# Altium PCB USB2JTAG.PcbDoc (part 2 of 2)
Units mm, origin at the board's own origin, x right, y up, seen from the top; angles counter-clockwise.
Board outline 52 x 33 mm, 2 copper layers (Top Layer, Bottom Layer), stack 1.535 mm thick; 102 components, 81 nets, 369 pads, 123 vias.
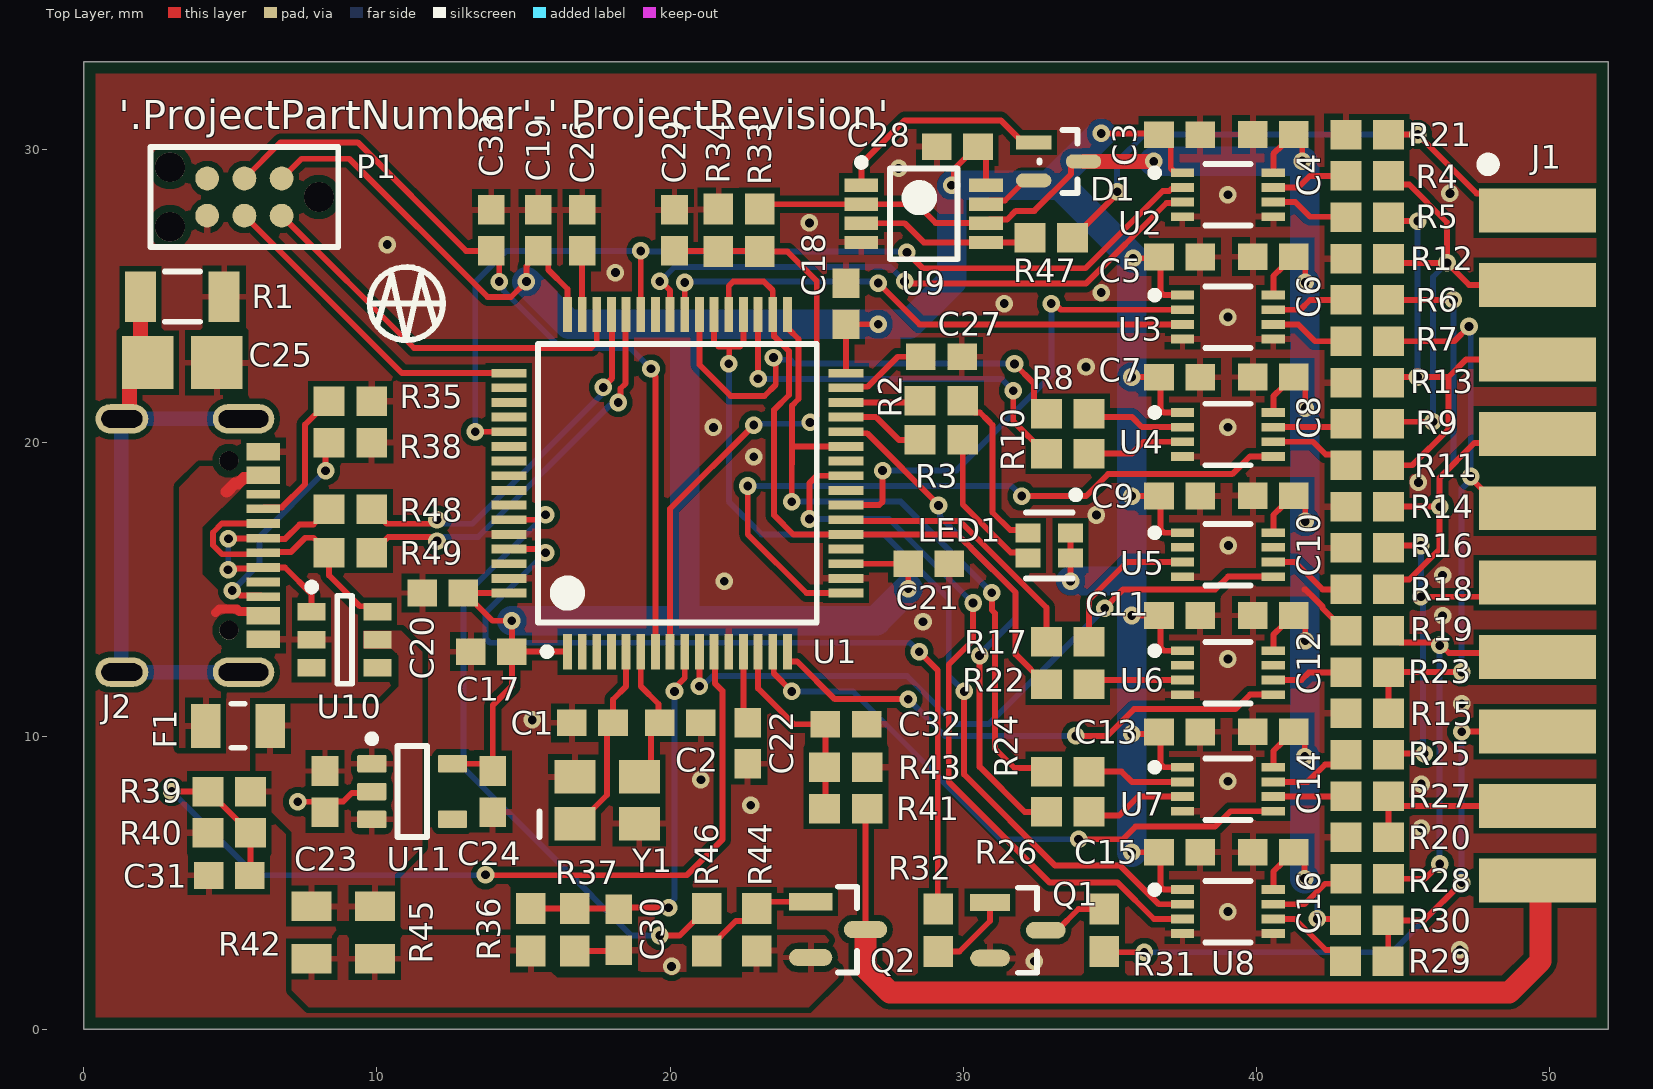
[diagram p0: Top Layer view]

## Via types
v1: diameter 0.6, hole 0.3, Top Layer to Bottom Layer, tented both sides, 123 vias

## Nets (pads, with @x,y where several pads share a name; then routed paths per layer and width w, separated by ;. In a path a pad name is that pad's centre, name@x,y a point inside that pad or via, vN(x,y) a via of type N, cw(c..) or ccw(c..) an arc to the next point about the centre after c; other vN are vias at no path point) (continued)
STM-RESETn: C33.1 P1.3 U1.7 | length 27.8
  Top Layer w0.2: P1.3 6.71,30.25 9.342,30.25 13.044,26.548 C33.1 14.173,26.275 v1(14.173,25.501) ; v1(19.35,22.528) 19.35,22.42 19.5,22.27 U1.7
  Bottom Layer w0.2: v1(14.173,25.501) 14.173,25.392 14.318,25.247 14.318,25.197 16.277,23.239 18.639,23.239 v1(19.35,22.528)
STM-SWCLK: P1.4 U1.49 | length 11.2
  Top Layer w0.2: P1.4 10.852,22.378 U1.49
STM-SWDIO: P1.2 U1.46 | length 13.6
  Top Layer w0.2: P1.2 11.261,23.239 17.296,23.239 17.5,23.443 U1.46
TCK_SWCLK: J1.9 R7.2 R15.1 R23.2 | length 21.7
  Top Layer w0.2: R15.1 R23.2 v1(47,12.184) ; R7.2 46.747,23.466 v1(47.25,23.969) ; v1(47.308,18.854) 47.308,18.802 48.34,17.77 J1.9@49.69,17.77
  Bottom Layer w0.2: v1(47,12.184) 47,18.437 47.308,18.746 47.308,23.911 v1(47.25,23.969)
TDI_TX: J1.5 R5.2 R11.2 R13.1 | length 16.2
  Top Layer w0.2: R11.2 45.316,19.235 46.55,20.469 46.55,22.248 ; R13.1 44.692,22.248 45.5,22.248 46.55,22.248 ; R5.2 44.632,27.565 v1(45.5,27.565) ; J1.5@49.69,22.85 47.152,22.85 46.55,22.248
  Bottom Layer w0.2: v1(45.494,22.248) 45.497,22.251 45.497,27.562 v1(45.5,27.565)
TDO_SWO: J1.13 R19.1 R28.2 | length 15
  Top Layer w0.2: R28.2 45.747,5.132 v1(46.25,5.635) ; R19.1 44.903,13.191 46.042,13.191 46.142,13.091 46.31,13.091 46.567,12.834 49.546,12.834 J1.13@49.69,12.69
  Bottom Layer w0.2: v1(46.25,5.635) v1(46.25,13.091)
TMS_SWDIO: J1.7 R6.2 R14.1 R18.2 | length 20
  Top Layer w0.2: R18.2 44.838,15.343 45.21,15.343 46.25,16.382 v1(46.25,17.825) ; R14.1 v1(46.25,17.825) ; R6.2 v1(46.72,24.876) ; J1.7@49.69,20.31 49.382,20.002 47.442,20.002 46.25,18.81 v1(46.25,17.825)
  Bottom Layer w0.2: v1(46.25,17.825) 46.25,18.81 46.72,19.28 v1(46.72,24.876)
USB_D_N: R49.1 U1.44 | length 13.8
  Top Layer w0.2: R49.1 9.847,16.25 10.384,16.787 11.804,16.787 11.941,16.651 v1(12.049,16.651) ; v1(18.233,21.378) 18.309,21.454 18.309,21.854 18.477,22.021 18.477,24.355 U1.44
  Bottom Layer w0.2: v1(12.049,16.651) 12.157,16.651 12.294,16.787 13.449,16.787 17.963,21.301 18.156,21.301 v1(18.233,21.378)
USB_D_P: R48.1 U1.45 | length 12.9
  Top Layer w0.2: R48.1 9.847,17.728 10.333,17.241 11.804,17.241 11.941,17.378 v1(12.049,17.378) ; v1(17.719,21.892) 17.719,21.905 18.023,22.209 18.023,24.355 U1.45
  Bottom Layer w0.2: v1(12.049,17.378) 12.157,17.378 12.294,17.241 13.261,17.241 17.642,21.622 17.642,21.815 v1(17.719,21.892)
VCCB: C4.2 C6.2 C8.2 C10.2 C12.2 C14.2 C16.2 D1.3 R30.1 R33.2 U2.8 U3.8 U4.8 U5.8 U6.8 U7.8 U8.8 U9.2 U9.6 | length 65.4
  Top Layer w0.2: R33.2 23.214,28.14 U9.2 28.421,28.14 29.058,27.503 30.762,27.503 U9.6 30.9,27.615 31.494,27.615 31.794,27.915 32.425,27.915 33.681,29.171 33.681,29.473 33.808,29.6 D1.3 ; U8.8 40.578,5.38 40.876,5.678 40.876,5.68 41.232,6.037 41.288,6.037 41.644,5.68 v1(41.644,5.136) ; U7.8 40.578,9.492 40.876,9.789 40.876,9.792 41.232,10.148 41.291,10.148 41.648,9.792 v1(41.648,9.298) ; U6.8 40.578,13.455 40.876,13.753 40.876,13.755 41.232,14.112 41.308,14.112 41.664,13.755 v1(41.664,13.25) ; U5.8 40.578,17.539 40.876,17.837 40.876,17.839 41.232,18.195 41.308,18.195 41.664,17.839 v1(41.664,17.322) ; U4.8 40.578,21.592 40.876,21.889 40.876,21.892 41.232,22.248 41.308,22.248 41.664,21.892 v1(41.664,21.187) ; U3.8 40.578,25.695 40.876,25.993 40.876,25.995 41.232,26.351 41.308,26.351 41.664,25.995 v1(41.664,25.473) ; U2.8 40.578,29.859 40.876,30.157 40.876,30.161 41.232,30.517 C4.2 41.565,30.232 v1(41.565,29.61) ; v1(42.079,3.762) 42.99,3.762 R30.1
  Top Layer w0.5: D1.3 v1(36.5,29.6)
  Bottom Layer w0.2: v1(41.644,5.136) 42.079,4.701 v1(42.079,3.762)
  Bottom Layer w1: v1(36.5,29.6) 36.51,29.61 v1(41.565,29.61) 41.644,29.531 v1(41.644,5.136)
VTref: J1.1 R21.1 R47.2 | length 20.1
  Top Layer w0.2: R47.2 33.75,27 35.25,28.5 v1(35.25,28.565) ; R21.1 v1(45.5,30.517) 47.507,28.51 49.11,28.51 J1.1@49.69,27.93
  Bottom Layer w0.2: v1(35.25,28.565) 35.25,29.587 36.181,30.517 v1(45.5,30.517)
pads on no net: J1.2 J2.A8 J2.B8 J2.H P1.5 P1.M1 P1.M2 P1.M3 U1.2 U1.3 U1.4 U1.20 U1.24 U1.26 U1.42 U1.50 U1.51 U1.52 U1.54 U1.55 U1.56 U1.57 U1.58 U1.62 U5.2 U5.7 U6.2 U6.7 U10.3 U10.4 U11.4

## Polygon pours and split planes (outlines as drawn)
GND on Top Layer "GND_L01_P003" (solid, remove dead copper, pour order 3): 0,33 0,0 52,0 52,33
NetF1_1 on Top Layer "NETF1_1_L01_P002" (solid, pour order 2): 3.961,19.2 3.25,18.489 3.25,9.6 4.666,9.6 4.666,12.941 5.525,13.8 6.675,13.8 6.675,14.4 5.166,14.4 4.048,15.517 4.048,17.123 5.525,18.6 6.675,18.6 6.675,19.2
NetQ2_2 on Top Layer "NETQ2_2_L01_P001" (solid, pour order 1): 7.09,3.198 7.09,1.331 7.671,0.75 24.73,0.75 25.73,1.75 25.73,2.743 25.273,3.2 22.453,3.2 22.453,1.75 16.146,1.75 15.753,2.143 15.753,3.198 14.747,3.198
+5V on Top Layer "+5V_L01_P000" (solid, pour order 0): 5.866,11.1 10.152,11.1 10.75,11.698 10.75,12.734 10.499,12.985 9.549,12.985 9.549,13.585 10.838,13.585 11.545,12.878 11.545,6.202 10.609,5.265 10.609,3.696 7.09,3.696 7.09,6.727 5.866,7.951 5.866,9.6
GND on Bottom Layer "GND_L02_P004" (solid, remove dead copper, pour order 4): 0,33 0,0 52,0 52,33

## Silkscreen, mask and mechanical layers (free items; w line width, h text height)
Top Overlay:
  circle w0.2: c11,24.75 r1.25
  lines w0.2: 9.75,24.75 12.25,24.75 ; 10,24 10.5,25.75 11,23.5 11.5,25.75 12,24
  text "'.ProjectPartNumber'-'.ProjectRevision'" at 1.2,30.7 h1